# Altium PCB Copy of main - shifted.PcbDoc (part 6 of 15)
Units mil, origin at the board's own origin, x right, y up, seen from the top; angles counter-clockwise.
Board outline 8394.55 x 5164.44 mil, 7 copper layers (Top Layer 1, Layer 2, Layer 3, Unused, Layer 4_pow, Layer 5_gnd, Bottom 6+gnd), stack 46.112 mil thick; 363 components, 409 nets, 1750 pads, 991 vias.
Unrouted connection lines stored in the file: 111.
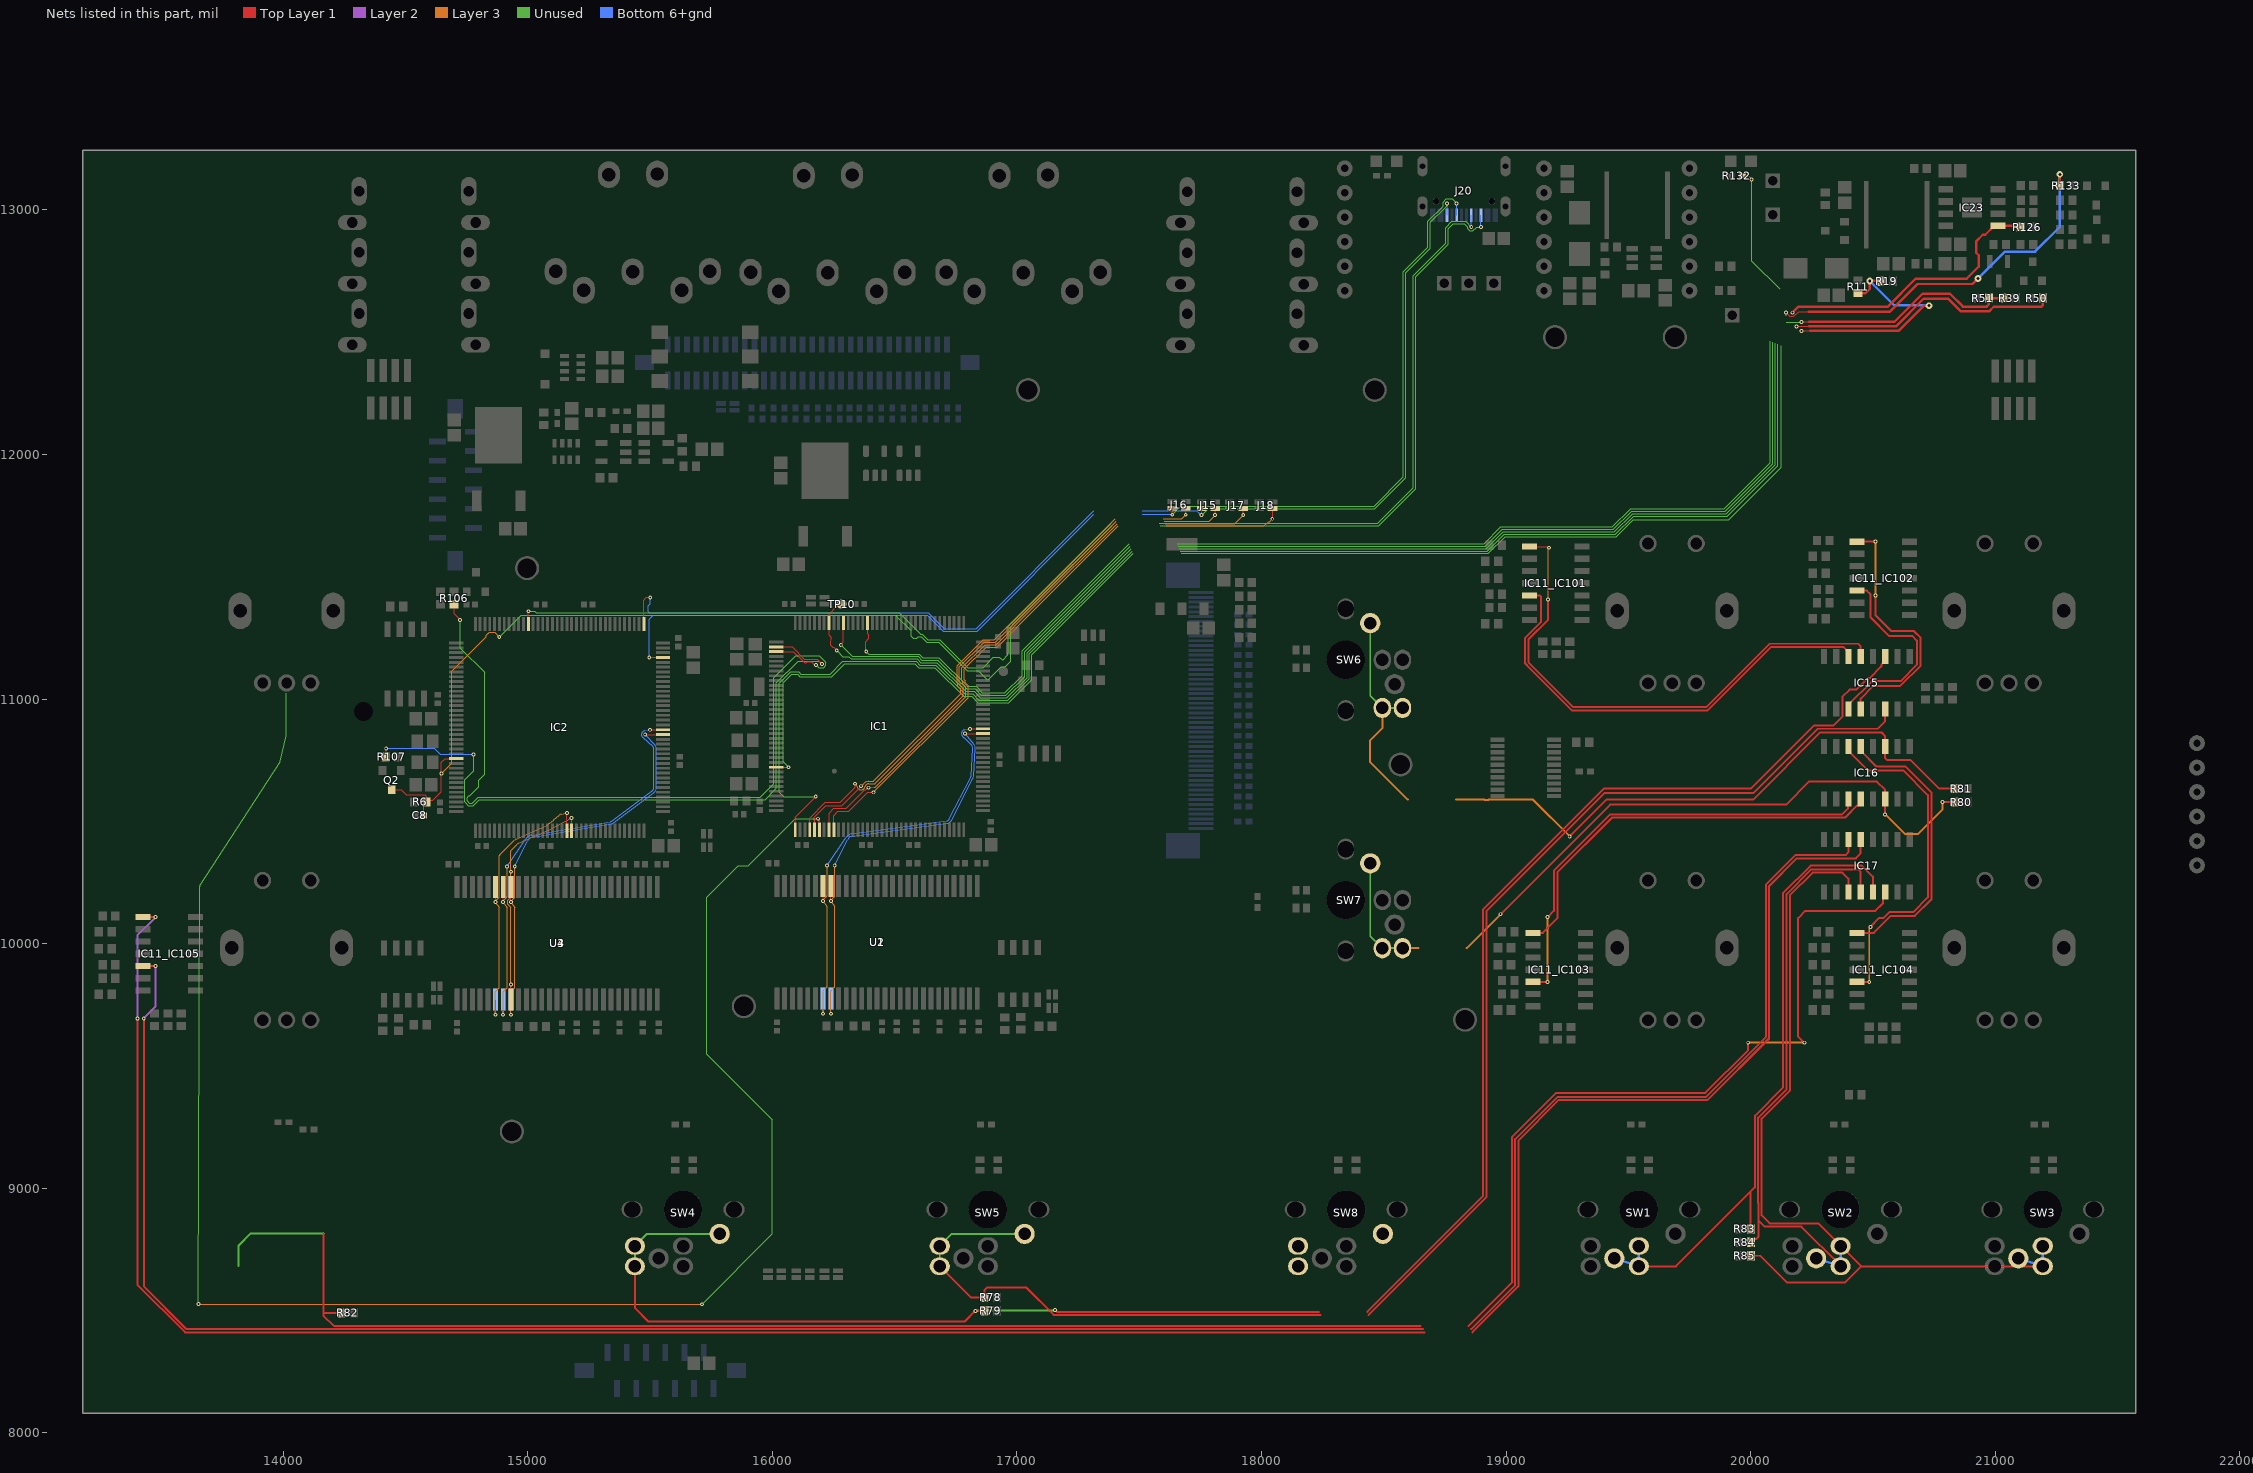
[diagram p9: the nets of this part, all layers, seen from the top]

## Via types
v1: diameter 15.75, hole 7.87, Top Layer 1 to Bottom 6+gnd, tented both sides, 923 vias
v2: diameter 27.56, hole 11.81, Top Layer 1 to Bottom 6+gnd, 45 vias
v3: diameter 23.62/23.62/23.62/23.62/23.62/23.62/23.62 (per signal layer), hole 12, Top Layer 1 to Bottom 6+gnd, tented top, 10 vias
v4: diameter 15.75, hole 7.87, Top Layer 1 to Bottom 6+gnd, 10 vias
v5: diameter 23.62/23.62/23.62/23.62/23.62/23.62/23.62 (per signal layer), hole 12, Top Layer 1 to Bottom 6+gnd, tented bottom, 3 vias

## Nets (pads, with @x,y where several pads share a name; then routed paths per layer and width w, separated by ;. In a path a pad name is that pad's centre, name@x,y a point inside that pad or via, vN(x,y) a via of type N, cw(c..) or ccw(c..) an arc to the next point about the centre after c; other vN are vias at no path point) (continued)
AA10: IC2.56 U3.22 U4.22 | length 1723.1
  Top Layer 1 w5: v1@14867.88,10170.19 U3.22@14867.88,10232.03 ; IC2.56@15159.54,10461.71 v1@15159.54,10534.31
  Layer 3 w5: v1(14867.64,9709.31) 14867.64,9803 14883.76,9819.12 14883.76,10145.78 ; v1(14867.64,10169.94) ccw(c14871.79,10172.73) 14867.72,10169.82 14882.83,10148.64 ; v1@14867.64,10175.64 14867.64,10175.51 cw(c14871.79,10172.73) 14868.22,10176.22 14882.3,10190.35 ; 14883.76,10193.83 14883.76,10360.07 ; v1(15159.46,10534.39) 15136.24,10529.43 ccw(c15139.46,10514.39) 15129.19,10525.84 15106.8,10505.74 ; 14882.3,10190.35 ccw(c14878.76,10193.88) 14883.76,10193.79 ; 14882.3,10190.35 ccw(c14878.76,10193.88) 14883.76,10193.79 ; 14882.3,10190.35 ccw(c14878.76,10193.88) 14883.76,10193.79 ; 14882.3,10190.35 ccw(c14878.76,10193.88) 14883.76,10193.79 ; 14882.3,10190.35 ccw(c14878.76,10193.88) 14883.76,10193.79 ; 14882.3,10190.35 ccw(c14878.76,10193.88) 14883.76,10193.79 ; 14882.3,10190.35 ccw(c14878.76,10193.88) 14883.76,10193.79 ; 14882.3,10190.35 ccw(c14878.76,10193.88) 14883.76,10193.79 ; 14882.3,10190.35 ccw(c14878.76,10193.88) 14883.76,10193.79 ; 14882.3,10190.35 ccw(c14878.76,10193.88) 14883.76,10193.79 ; 14882.3,10190.35 ccw(c14878.76,10193.88) 14883.76,10193.79 ; 14882.3,10190.35 ccw(c14878.76,10193.88) 14883.76,10193.79 ; 14882.3,10190.35 ccw(c14878.76,10193.88) 14883.76,10193.79 ; 14882.3,10190.35 ccw(c14878.76,10193.88) 14883.76,10193.79 ; 14882.3,10190.35 ccw(c14878.76,10193.88) 14883.76,10193.79 ; 14882.3,10190.35 ccw(c14878.76,10193.88) 14883.76,10193.79 ; 14882.83,10148.64 cw(c14878.76,10145.74) 14883.76,10145.83 ; 14882.83,10148.64 cw(c14878.76,10145.74) 14883.76,10145.83 ; 14882.83,10148.64 cw(c14878.76,10145.74) 14883.76,10145.83 ; 14882.83,10148.64 cw(c14878.76,10145.74) 14883.76,10145.83 ; 14882.83,10148.64 cw(c14878.76,10145.74) 14883.76,10145.83 ; 14882.83,10148.64 cw(c14878.76,10145.74) 14883.76,10145.83 ; 14882.83,10148.64 cw(c14878.76,10145.74) 14883.76,10145.83 ; 14882.83,10148.64 cw(c14878.76,10145.74) 14883.76,10145.83 ; 14882.83,10148.64 cw(c14878.76,10145.74) 14883.76,10145.83 ; 14882.83,10148.64 cw(c14878.76,10145.74) 14883.76,10145.83 ; 14882.83,10148.64 cw(c14878.76,10145.74) 14883.76,10145.83 ; 14882.83,10148.64 cw(c14878.76,10145.74) 14883.76,10145.83 ; 14882.83,10148.64 cw(c14878.76,10145.74) 14883.76,10145.83 ; 14882.83,10148.64 cw(c14878.76,10145.74) 14883.76,10145.83 ; 14882.83,10148.64 cw(c14878.76,10145.74) 14883.76,10145.83 ; 14882.83,10148.64 cw(c14878.76,10145.74) 14883.76,10145.83 ; 14883.76,10360.07 cw(c14888.76,10360.07) 14885.2,10363.58 ; 14883.76,10360.07 cw(c14888.76,10360.07) 14885.2,10363.58 ; 14883.76,10360.07 cw(c14888.76,10360.07) 14885.2,10363.58 ; 14883.76,10360.07 cw(c14888.76,10360.07) 14885.2,10363.58 ; 14883.76,10360.07 cw(c14888.76,10360.07) 14885.2,10363.58 ; 14883.76,10360.07 cw(c14888.76,10360.07) 14885.2,10363.58 ; 14883.76,10360.07 cw(c14888.76,10360.07) 14885.2,10363.58 ; 14883.76,10360.07 cw(c14888.76,10360.07) 14885.2,10363.58 ; 14883.76,10360.07 cw(c14888.76,10360.07) 14885.2,10363.58 ; 14883.76,10360.07 cw(c14888.76,10360.07) 14885.2,10363.58 ; 14883.76,10360.07 cw(c14888.76,10360.07) 14885.2,10363.58 ; 14883.76,10360.07 cw(c14888.76,10360.07) 14885.2,10363.58 ; 14883.76,10360.07 cw(c14888.76,10360.07) 14885.2,10363.58 ; 14883.76,10360.07 cw(c14888.76,10360.07) 14885.2,10363.58 ; 14883.76,10360.07 cw(c14888.76,10360.07) 14885.2,10363.58 ; 14883.76,10360.07 cw(c14888.76,10360.07) 14885.2,10363.58 ; 14885.2,10363.58 14942.45,10420.83 ; 14942.45,10420.83 cw(c14967.12,10396.01) 14952.68,10427.89 ; 14942.45,10420.83 cw(c14967.12,10396.01) 14952.68,10427.89 ; 14942.45,10420.83 cw(c14967.12,10396.01) 14952.68,10427.89 ; 14942.45,10420.83 cw(c14967.12,10396.01) 14952.68,10427.89 ; 14942.45,10420.83 cw(c14967.12,10396.01) 14952.68,10427.89 ; 14942.45,10420.83 cw(c14967.12,10396.01) 14952.68,10427.89 ; 14942.45,10420.83 cw(c14967.12,10396.01) 14952.68,10427.89 ; 14942.45,10420.83 cw(c14967.12,10396.01) 14952.68,10427.89 ; 14942.45,10420.83 cw(c14967.12,10396.01) 14952.68,10427.89 ; 14942.45,10420.83 cw(c14967.12,10396.01) 14952.68,10427.89 ; 14942.45,10420.83 cw(c14967.12,10396.01) 14952.68,10427.89 ; 14942.45,10420.83 cw(c14967.12,10396.01) 14952.68,10427.89 ; 14942.45,10420.83 cw(c14967.12,10396.01) 14952.68,10427.89 ; 14942.45,10420.83 cw(c14967.12,10396.01) 14952.68,10427.89 ; 14942.45,10420.83 cw(c14967.12,10396.01) 14952.68,10427.89 ; 14942.45,10420.83 cw(c14967.12,10396.01) 14952.68,10427.89 ; 14952.68,10427.89 15002.85,10450.71 ; 15002.85,10450.71 cw(c15021.64,10409.41) 15003.8,10451.13 ; 15002.85,10450.71 cw(c15021.64,10409.41) 15003.8,10451.13 ; 15002.85,10450.71 cw(c15021.64,10409.41) 15003.79,10451.13 ; 15002.85,10450.71 cw(c15021.64,10409.41) 15003.79,10451.13 ; 15002.85,10450.71 cw(c15021.64,10409.41) 15003.79,10451.13 ; 15002.85,10450.71 cw(c15021.64,10409.41) 15003.79,10451.13 ; 15002.85,10450.71 cw(c15021.64,10409.41) 15003.79,10451.13 ; 15002.85,10450.71 cw(c15021.64,10409.41) 15003.79,10451.13 ; 15002.85,10450.71 cw(c15021.64,10409.41) 15003.79,10451.13 ; 15002.85,10450.71 cw(c15021.64,10409.41) 15003.79,10451.13 ; 15002.85,10450.71 cw(c15021.64,10409.41) 15003.79,10451.13 ; 15002.85,10450.71 cw(c15021.64,10409.41) 15003.79,10451.13 ; 15002.85,10450.71 cw(c15021.64,10409.41) 15003.79,10451.13 ; 15002.85,10450.71 cw(c15021.64,10409.41) 15003.79,10451.13 ; 15002.85,10450.71 cw(c15021.64,10409.41) 15003.79,10451.13 ; 15002.85,10450.71 cw(c15021.64,10409.41) 15003.79,10451.13 ; 15003.8,10451.13 15075.96,10482.13 ; 15075.96,10482.13 ccw(c15062,10514.63) 15084.49,10487.33 ; 15075.96,10482.13 ccw(c15062,10514.63) 15084.49,10487.33 ; 15075.96,10482.13 ccw(c15062,10514.63) 15084.49,10487.33 ; 15075.96,10482.13 ccw(c15062,10514.63) 15084.49,10487.33 ; 15075.96,10482.13 ccw(c15062,10514.63) 15084.49,10487.33 ; 15075.96,10482.13 ccw(c15062,10514.63) 15084.49,10487.33 ; 15075.96,10482.13 ccw(c15062,10514.63) 15084.49,10487.33 ; 15075.96,10482.13 ccw(c15062,10514.63) 15084.49,10487.33 ; 15075.96,10482.13 ccw(c15062,10514.63) 15084.49,10487.33 ; 15075.96,10482.13 ccw(c15062,10514.63) 15084.49,10487.33 ; 15075.96,10482.13 ccw(c15062,10514.63) 15084.49,10487.33 ; 15075.96,10482.13 ccw(c15062,10514.63) 15084.49,10487.33 ; 15075.96,10482.13 ccw(c15062,10514.63) 15084.49,10487.33 ; 15075.96,10482.13 ccw(c15062,10514.63) 15084.49,10487.33 ; 15075.96,10482.13 ccw(c15062,10514.63) 15084.49,10487.33 ; 15075.96,10482.13 ccw(c15062,10514.63) 15084.49,10487.33 ; 15084.49,10487.33 15105.99,10505.05 ; 15105.99,10505.05 ccw(c15089.85,10524.63) 15106.8,10505.74 ; 15105.99,10505.05 ccw(c15089.85,10524.63) 15106.8,10505.74 ; 15105.99,10505.05 ccw(c15089.85,10524.63) 15106.8,10505.74 ; 15105.99,10505.05 ccw(c15089.85,10524.63) 15106.8,10505.74 ; 15105.99,10505.05 ccw(c15089.85,10524.63) 15106.8,10505.74 ; 15105.99,10505.05 ccw(c15089.85,10524.63) 15106.8,10505.74 ; 15105.99,10505.05 ccw(c15089.85,10524.63) 15106.8,10505.74 ; 15105.99,10505.05 ccw(c15089.85,10524.63) 15106.8,10505.74 ; 15105.99,10505.05 ccw(c15089.85,10524.63) 15106.8,10505.74 ; 15105.99,10505.05 ccw(c15089.85,10524.63) 15106.8,10505.74 ; 15105.99,10505.05 ccw(c15089.85,10524.63) 15106.8,10505.74 ; 15105.99,10505.05 ccw(c15089.85,10524.63) 15106.8,10505.74 ; 15105.99,10505.05 ccw(c15089.85,10524.63) 15106.8,10505.74 ; 15105.99,10505.05 ccw(c15089.85,10524.63) 15106.8,10505.74 ; 15105.99,10505.05 ccw(c15089.85,10524.63) 15106.8,10505.74 ; 15105.99,10505.05 ccw(c15089.85,10524.63) 15106.8,10505.74
  Bottom 6+gnd w5: v1@14867.88,9709.56 U4.22@14867.88,9771.4
AA11: IC2.57 U3.35 U4.35 | length 1197.8
  Top Layer 1 w5: U3.35@14930.87,9771.4 v1@14930.87,9833.49 ; IC2.57@15179.12,10461.87 v1@15179.06,10514.16
  Layer 3 w5: v1(14931.12,9833.49) 14931.12,10145.64 ; 14931.12,10195.56 14931.12,10293.63 v1(14930.63,10294.12) 14930.63,10378.65 ; v1(15178.83,10514.39) 15088.14,10465.82 cw(c15062,10514.63) 15083.87,10463.76 15011.72,10432.77 ; 14929.66,10149.12 cw(c14926.12,10145.59) 14931.12,10145.68 ; 14929.66,10149.12 cw(c14926.12,10145.59) 14931.12,10145.68 ; 14929.66,10149.12 cw(c14926.12,10145.59) 14931.12,10145.68 ; 14929.66,10149.12 cw(c14926.12,10145.59) 14931.12,10145.68 ; 14929.66,10149.12 cw(c14926.12,10145.59) 14931.12,10145.68 ; 14929.66,10149.12 cw(c14926.12,10145.59) 14931.12,10145.68 ; 14929.66,10149.12 cw(c14926.12,10145.59) 14931.12,10145.68 ; 14929.66,10149.12 cw(c14926.12,10145.59) 14931.12,10145.68 ; 14929.66,10149.12 cw(c14926.12,10145.59) 14931.12,10145.68 ; 14929.66,10149.12 cw(c14926.12,10145.59) 14931.12,10145.68 ; 14929.66,10149.12 cw(c14926.12,10145.59) 14931.12,10145.68 ; 14929.66,10149.12 cw(c14926.12,10145.59) 14931.12,10145.68 ; 14929.66,10149.12 cw(c14926.12,10145.59) 14931.12,10145.68 ; 14929.66,10149.12 cw(c14926.12,10145.59) 14931.12,10145.68 ; 14929.66,10149.12 cw(c14926.12,10145.59) 14931.12,10145.68 ; 14929.66,10149.12 cw(c14926.12,10145.59) 14931.12,10145.68 ; 14929.66,10149.12 14919.73,10159.1 cw(c14930.63,10169.94) 14919.1,10180.12 14929.86,10192.29 ; 14929.86,10192.29 ccw(c14926.12,10195.6) 14931.12,10195.51 ; 14929.86,10192.29 ccw(c14926.12,10195.6) 14931.12,10195.51 ; 14929.86,10192.29 ccw(c14926.12,10195.6) 14931.12,10195.51 ; 14929.86,10192.29 ccw(c14926.12,10195.6) 14931.12,10195.51 ; 14929.86,10192.29 ccw(c14926.12,10195.6) 14931.12,10195.51 ; 14929.86,10192.29 ccw(c14926.12,10195.6) 14931.12,10195.51 ; 14929.86,10192.29 ccw(c14926.12,10195.6) 14931.12,10195.51 ; 14929.86,10192.29 ccw(c14926.12,10195.6) 14931.12,10195.51 ; 14929.86,10192.29 ccw(c14926.12,10195.6) 14931.12,10195.51 ; 14929.86,10192.29 ccw(c14926.12,10195.6) 14931.12,10195.51 ; 14929.86,10192.29 ccw(c14926.12,10195.6) 14931.12,10195.51 ; 14929.86,10192.29 ccw(c14926.12,10195.6) 14931.12,10195.51 ; 14929.86,10192.29 ccw(c14926.12,10195.6) 14931.12,10195.51 ; 14929.86,10192.29 ccw(c14926.12,10195.6) 14931.12,10195.51 ; 14929.86,10192.29 ccw(c14926.12,10195.6) 14931.12,10195.51 ; 14929.86,10192.29 ccw(c14926.12,10195.6) 14931.12,10195.51 ; 14930.63,10378.65 cw(c14935.63,10378.65) 14932.07,10382.17 ; 14930.63,10378.65 cw(c14935.63,10378.65) 14932.07,10382.17 ; 14930.63,10378.65 cw(c14935.63,10378.65) 14932.07,10382.17 ; 14930.63,10378.65 cw(c14935.63,10378.65) 14932.07,10382.17 ; 14930.63,10378.65 cw(c14935.63,10378.65) 14932.07,10382.17 ; 14930.63,10378.65 cw(c14935.63,10378.65) 14932.07,10382.17 ; 14930.63,10378.65 cw(c14935.63,10378.65) 14932.07,10382.17 ; 14930.63,10378.65 cw(c14935.63,10378.65) 14932.07,10382.17 ; 14930.63,10378.65 cw(c14935.63,10378.65) 14932.07,10382.17 ; 14930.63,10378.65 cw(c14935.63,10378.65) 14932.07,10382.17 ; 14930.63,10378.65 cw(c14935.63,10378.65) 14932.07,10382.17 ; 14930.63,10378.65 cw(c14935.63,10378.65) 14932.07,10382.17 ; 14930.63,10378.65 cw(c14935.63,10378.65) 14932.07,10382.17 ; 14930.63,10378.65 cw(c14935.63,10378.65) 14932.07,10382.17 ; 14930.63,10378.65 cw(c14935.63,10378.65) 14932.07,10382.17 ; 14930.63,10378.65 cw(c14935.63,10378.65) 14932.07,10382.17 ; 14932.07,10382.17 14956.56,10406.65 cw(c14967.12,10396.01) 14960.91,10409.66 15011.08,10432.48 ; 15011.08,10432.48 cw(c15021.64,10409.41) 15011.72,10432.77 ; 15011.08,10432.48 cw(c15021.64,10409.41) 15011.72,10432.77 ; 15011.08,10432.48 cw(c15021.64,10409.41) 15011.72,10432.77 ; 15011.08,10432.48 cw(c15021.64,10409.41) 15011.72,10432.77 ; 15011.08,10432.48 cw(c15021.64,10409.41) 15011.72,10432.77 ; 15011.08,10432.48 cw(c15021.64,10409.41) 15011.72,10432.77 ; 15011.08,10432.48 cw(c15021.64,10409.41) 15011.72,10432.77 ; 15011.08,10432.48 cw(c15021.64,10409.41) 15011.72,10432.77 ; 15011.08,10432.48 cw(c15021.64,10409.41) 15011.72,10432.77 ; 15011.08,10432.48 cw(c15021.64,10409.41) 15011.72,10432.77 ; 15011.08,10432.48 cw(c15021.64,10409.41) 15011.72,10432.77 ; 15011.08,10432.48 cw(c15021.64,10409.41) 15011.72,10432.77 ; 15011.08,10432.48 cw(c15021.64,10409.41) 15011.72,10432.77 ; 15011.08,10432.48 cw(c15021.64,10409.41) 15011.72,10432.77 ; 15011.08,10432.48 cw(c15021.64,10409.41) 15011.72,10432.77 ; 15011.08,10432.48 cw(c15021.64,10409.41) 15011.72,10432.77
  Bottom 6+gnd w5: U4.35@14930.87,10232.03 v1@14930.87,10293.87
ADC3: IC1.40 J15.3 | length 2171.1
  Top Layer 1 w5: IC1.40@16152.72,10466.06 16152.72,10513.38 16216.73,10577.4 16276.73,10577.4 16338.15,10638.82 v1(16338.15,10653.82) ; v1@17810.12,11752.72 J15.3@17810.12,11778.82
  Layer 3 w5: v1(16338.15,10653.82) 16349.97,10635.49 ccw(c16362.89,10643.82) 16377.12,10637.99 16379.41,10643.59 cw(c16393.64,10637.76) 16393.2,10653.13 16417.96,10653.84 ccw(c16417.81,10658.84) 16421.33,10655.28 16780.39,11014.34 16780.39,11045.72 16768.49,11057.62 16768.49,11066.26 16764.86,11069.89 16764.86,11131.86 16865.84,11232.83 16911.08,11232.83 17054.97,11376.72 17054.97,11377.1 17405.74,11727.87 ; 17602.59,11727.87 17785.51,11727.87 v1(17810.24,11752.6)
ADC4: IC1.41 J16.3 | length 2000.2
  Top Layer 1 w5: IC1.41@16172.4,10466.06 16172.42,10503.18 16170.82,10504.78 16170.82,10517.35 16217.71,10564.23 16283.31,10564.23 v1(16362.89,10643.82) ; v1@17690,11753.94 J16.3@17690,11780.04
  Layer 3 w5: v1(16362.89,10643.82) 16376.36,10656.34 cw(c16393.64,10637.76) 16392.19,10663.1 16411.76,10664.22 ccw(c16411.47,10669.21) 16414.99,10665.66 16770.39,11021.06 16770.39,11041.58 16758.49,11053.48 16758.49,11062.12 16754.86,11065.75 16754.86,11136 16861.69,11242.83 16906.93,11242.83 17043.15,11379.05 17043.15,11379.43 17401.6,11737.87 ; 17598.45,11737.87 17674.17,11737.87 v1(17690.12,11753.82)
ADC5: IC1.44 J17.3 | length 2185.5
  Top Layer 1 w5: IC1.44@16231.57,10466.17 16231.57,10533.33 16250.93,10552.7 16302.03,10552.7 16377.73,10628.4 16381.36,10628.4 16390.73,10637.76 v1(16393.64,10637.76) ; v1@17925.12,11752.72 J17.3@17925.12,11778.82
  Layer 3 w5: v1(16393.64,10637.76) 16417.16,10638.82 ccw(c16416.94,10643.82) 16420.47,10640.28 16790.39,11010.2 16790.39,11049.86 16778.49,11061.76 16778.49,11070.4 16774.86,11074.03 16774.86,11127.72 16869.98,11222.83 16915.22,11222.83 17064.97,11372.58 17064.97,11372.96 17409.88,11717.87 ; 17606.73,11717.87 17890.51,11717.87 v1(17925.24,11752.6)
ADC6: IC1.45 J18.3 | length 2289.6
  Top Layer 1 w5: IC1.45@16251.14,10466.06 16251.14,10523.99 16267.98,10540.83 16312.44,10540.83 16390.43,10618.82 v1(16413.15,10618.82) ; v1(18044.13,11737.22) 18045.12,11738.21 J18.3@18045.12,11778.82
  Layer 3 w5: v1(16413.15,10618.82) 16800.39,11006.06 16800.39,11054 16788.49,11065.9 16788.49,11074.55 16784.86,11078.18 16784.86,11123.57 16874.12,11212.83 16919.36,11212.83 17074.97,11368.44 17074.97,11368.82 17414.02,11707.87 ; 17610.87,11707.87 18011.84,11707.87 18030.02,11726.06 18032.96,11726.06 v1(18044.13,11737.22)
ADC_ON: IC1.137 R39.1 R51.2 TP10.1 | length 5894.1
  Top Layer 1 w5: v1(16263.15,11198.82) 16250.11,11211.86 16246.65,11211.86 16237.64,11220.87 16237.64,11237.47 16240.38,11240.21 16240.38,11252.94 16231.46,11261.87 IC1.137@16231.46,11311.57 16231.46,11347.13 16263.93,11379.6 16264.63,11379.6 16273.85,11388.82 TP10.1@16283.15,11388.82 ; v1(20207.88,12542.24) 20240.01,12542.24 20240.47,12542.7
  Top Layer 1 w10: 20240.47,12542.7 20587.73,12542.7 20702.6,12657.57 20815.11,12657.57 20867.69,12605 20964.65,12605 20974.02,12614.37 R51.2@20974.02,12639.37 R39.1@21032.83,12639.37
  Unused w5: v1(16263.15,11198.82) 16288.22,11173.74 16313.21,11173.74 16322.68,11164.27 16591.55,11164.27 16607,11148.82 16672.9,11148.82 16789.98,11031.74 16824.37,11031.74 16850.28,11005.83 16959.15,11005.83 17041.15,11087.82 17041.15,11189.4 17467.14,11615.39 ; 17663.99,11615.39 18919,11615.39 18987.43,11683.82 19442.43,11683.82 19517.05,11758.44 19900.87,11758.44 20100,11957.57 20100,12455.88 ; 20144.75,12540 20199.57,12540 20199.75,12540.18 20205.82,12540.18 v1(20207.88,12542.24)
ADC_VBAT: IC1.37 R50.2 | length 6830.8
  Top Layer 1 w5: IC1.37@16093.66,10472.3 16093.66,10517.58 v1(16177.28,10601.21) ; v1(20187.63,12523.86) 20239.74,12523.86 20239.89,12524.01
  Top Layer 1 w10: 20239.89,12524.01 20594.3,12524.01 20707.87,12637.57 20806.83,12637.57 20859.4,12585 20974.65,12585 20993.98,12604.34 21189.34,12604.34 21195.2,12610.19 R50.2@21195.2,12639.37
  Unused w5: v1(16177.28,10601.21) 16046.63,10601.21 16044.47,10603.37 16028.15,10619.68 16028.15,11063.82 16075.44,11111.1 16107.17,11111.1 16116.44,11101.83 16236.16,11101.83 16288.61,11154.27 16587.41,11154.27 16602.86,11138.82 16668.75,11138.82 16785.83,11021.74 16818.38,11021.74 16844.29,10995.83 16963.29,10995.83 17051.15,11083.68 17051.15,11185.26 17471.28,11605.39 ; 17668.13,11605.39 18923.14,11605.39 18991.57,11673.82 19446.57,11673.82 19521.19,11748.44 19905.01,11748.44 20110,11953.43 20110,12451.74
ADC_VOL: IC1.42 | length 7186.8
  Top Layer 1 w5: v1(16186.2,10510.94) 16186.2,10508.6 16192.2,10502.6 16192.2,10466.17 IC1.42@16192.09,10466.06
  Unused w5: v1(13653.15,8526) 13658.15,10233.53 cw(c13663.15,10233.52) 13658.94,10236.22 13987.68,10744.28 ccw(c13983.48,10746.99) 13988.35,10745.84 14013.15,10850 14013.15,11024.25 ; v1(15712.58,8525.57) 16000.15,8813.15 16000.15,9279 15732.15,9547 15732.15,10189.82 15861.33,10319 15901.17,10319 16093.11,10510.94 v1(16186.2,10510.94)
  Layer 3 w5: v1(13653.15,8526) v1@15712.58,8526
ADC_VUSB: IC1.27 R11.1 R19.2 | length 6337.8
  Top Layer 1 w5: IC1.27@16015.47,10721.42 16015.5,10721.46 16066.16,10721.46 v1(16066.2,10721.42) ; v1(20208.62,12505.76) 20209.06,12505.32 20243.39,12505.32
  Top Layer 1 w10: 20243.39,12505.32 20605.16,12505.32 20708.63,12608.79 v2(20729.65,12608.79) ; R11.1@20439.65,12660 20469.65,12660 20487.15,12677.5 v2(20487.15,12710) R19.2@20529.65,12710
  Unused w5: v1(16066.2,10721.42) 16044.45,10743.17 16044.45,11065.98 16079.58,11101.1 16103.02,11101.1 16112.3,11091.83 16243.07,11091.83 16295.51,11144.27 16582.69,11144.27 16598.15,11128.82 16664.61,11128.82 16781.69,11011.74 16814.24,11011.74 16840.15,10985.83 16967.44,10985.83 17061.15,11079.54 17061.15,11181.12 17475.42,11595.39 ; 17672.27,11595.39 18927.28,11595.39 18995.71,11663.82 19450.71,11663.82 19519.96,11733.07 19911.38,11733.07 20125.37,11947.06 20125.37,12445.37 ; 20200.31,12508.49 20200.98,12507.82 20206.56,12507.82 v1(20208.62,12505.76)
  Bottom 6+gnd w10: v2(20487.15,12710) 20587.15,12610 20728.44,12610 v2(20729.65,12608.79)
AUDIO_BOOT: IC1.3 R106.1 | length 3126.4
  Top Layer 1 w5: R106.1@14698.15,11393.54 14698.15,11348.82 v1(14723.15,11323.82) ; IC1.3@16015.39,11193.94 16085.85,11193.94 16125.97,11153.82 16126.41,11153.82 16131.84,11148.39 16137.7,11148.39 16142.18,11152.87 16159.1,11152.87 16173.15,11138.82 v1(16177.59,11138.82)
  Unused w5: v1(14723.15,11323.82) 14723.15,11208.82 14823.17,11108.8 14823.17,10692.81 14798.34,10667.99 14798.34,10641.31 14762.5,10605.47 14760.48,10605.47 14758.83,10603.82 14758.15,10603.82 14751.48,10597.15 14751.48,10583.73 14760.48,10574.73 14773.22,10574.73 14797.31,10598.82 15950.21,10598.82 16006.26,10654.87 16006.26,11086.93 16096.02,11176.69 16138.63,11176.69 16138.87,11176.46 16192.25,11176.46 16218.15,11150.56 16218.15,11137.82 16209.14,11128.82 16190.5,11128.82 16180.5,11138.82 v1(16177.59,11138.82)
AUDIO_NRST: C8.2 IC2.25 J20.B5 Q2.3 R6.2 | length 6660.8
  Top Layer 1 w5: Q2.3@14443.15,10629.45 14482.52,10629.45 14502.81,10609.16 14578.15,10609.16 14584.41,10602.9 14584.41,10580.72 R6.2@14585.5,10579.63 ; C8.2@14574.91,10524.63 14574.91,10569.04 R6.2@14585.5,10579.63 ; IC2.25@14707.15,10756.68 14661.96,10756.68 14646.54,10741.26 v1(14646.54,10695.26) 14646.54,10620.54 14611.96,10585.96 14591.83,10585.96 R6.2@14585.5,10579.63
  Unused w5: v1(14883.15,11253.82) 14973.15,11343.82 16503.32,11343.82 16567.53,11279.61 16567.53,11257.87 16576.53,11248.86 16589.27,11248.86 16596.32,11255.91 16608.38,11255.91 16631.71,11232.58 16679.74,11232.58 16796.12,11116.2 16841.12,11116.2 16878.33,11079 16882.64,11079 16936.61,11132.97 16952.3,11132.97 16974.84,11155.51 16974.84,11294.12 17389.71,11708.99 ; 17586.56,11708.99 18478.99,11708.99 18630.37,11860.37 18630.37,12727.65 18763.32,12860.6 18763.32,12923.82 18782.93,12943.43 18829.22,12943.43 18842.4,12930.25 18842.4,12923.69 18851.4,12914.68 18864.14,12914.68 18879.51,12930.05 v1(18897.14,12930.05)
  Layer 3 w5: v1(14646.54,10695.26) 14688.15,10736.86 14688.15,11113.82 14829.48,11255.14 14829.48,11261 14837.29,11268.81 14839.17,11268.81 14843.04,11272.68 14864.29,11272.68 v1(14883.15,11253.82)
  Bottom 6+gnd w5: J20.B5@18896.71,12978.4 18896.71,12930.49 v1(18897.14,12930.05)
AUDIO_RST: IC1.2 R107.1 | length 2792.5
  Top Layer 1 w5: R107.1@14420.51,10768.82 14420.51,10797.95 v1(14420.85,10798.29) ; IC1.2@16015.39,11213.62 16080.31,11213.62 16130.11,11163.82 16183.15,11163.82 v1(16202.78,11144.19)
  Unused w5: v1(14778.15,10773.82) 14778.15,10706.08 14741.48,10669.41 14741.48,10579.59 14756.34,10564.73 14777.36,10564.73 14801.45,10588.82 15970.21,10588.82 16016.26,10634.87 16016.26,11066.93 16104.81,11155.48 16188.58,11155.48 16199.87,11144.19 v1(16202.78,11144.19)
  Bottom 6+gnd w5: v1(14420.85,10798.29) 14617.43,10798.29 14641.9,10773.82 v1(14778.15,10773.82)
AUDIO_SWD.CLK_1: IC2.109 J15.1 J20.B8 | length 4655.8
  Top Layer 1 w5: IC2.109@15474.4,11307.38 15473.95,11307.83 15473.95,11405.04 15484.96,11416.05 v1(15500.64,11416.05) ; v1@17755,11752.72 J15.1@17755,11778.82
  Unused w5: v1(17755.12,11752.6) 17781.42,11778.9 18463.98,11778.9 18590.37,11905.29 18590.37,12744.22 18689.39,12843.24 18689.39,12948.89 18756.42,13015.92 18756.42,13024.41 v1@18758.62,13026.61
  Bottom 6+gnd w5: v1(15500.64,11416.05) 15500.64,11388.99 15492.8,11381.15 15492.8,11356.99 15495.97,11353.82 16636.91,11353.82 16702.84,11287.89 16832.64,11287.89 17314.55,11769.8 ; 17511.4,11769.8 17735.83,11769.8 17753.03,11752.6 v1(17755.12,11752.6) ; J20.B8@18758.91,12978.4 v1@18758.91,13026.32
  other v1: 18758.48,13026.75
AUDIO_SWD.IO_1: IC2.105 J16.1 J20.B7 | length 4729.9
  Top Layer 1 w5: v1(15496.48,11170.26) 15496.58,11170.16 15552.57,11170.16 IC2.105@15552.67,11170.06 ; J16.1@17634.88,11780.04 17634.88,11753.94 v1(17635,11753.82)
  Unused w5: v1(17635,11753.82) 17670.17,11788.98 18459.93,11788.98 18580.37,11909.43 18580.37,12748.36 18679.39,12847.38 18679.39,12953.03 18742.35,13015.99 18742.35,13032.37 18755.04,13045.05 18779.55,13045.05 v1(18797.85,13026.75)
  Bottom 6+gnd w5: v1(15496.48,11170.26) 15496.48,11327.15 15512.78,11343.44 16633.14,11343.44 16698.69,11277.89 16836.78,11277.89 17314.69,11755.81 ; 17511.54,11755.81 17633.01,11755.81 v1(17635,11753.82) ; J20.B7@18798.28,12978.4 v1@18798.28,13026.32
AUDIO_SWD.SWO_1: IC2.133 J20.B6 | length 5240.2
  Top Layer 1 w5: IC2.133@15001.96,11307.38 15001.96,11358 v1(15003.15,11359.19)
  Unused w5: v1(15003.15,11359.19) 15028.38,11359.19 15033.75,11353.82 16518.62,11353.82 16606.53,11265.91 16612.52,11265.91 16635.85,11242.58 16684.39,11242.58 16798.15,11128.82 16861.59,11128.82 16903.92,11171.15 16928.54,11171.15 16938.85,11160.83 16942.99,11160.83 16963.15,11180.99 16963.15,11188.82 16964.84,11190.51 16964.84,11298.26 17385.57,11718.99 ; 17582.42,11718.99 18474.84,11718.99 18620.37,11864.51 18620.37,12731.79 18753.32,12864.75 18753.32,12927.96 18778.78,12953.43 18834.4,12953.43 v1(18857.77,12930.05)
  Bottom 6+gnd w5: v1@18857.34,12930.49 J20.B6@18857.34,12978.4
B_ENC1: IC11_IC101.8 IC15.13 | length 2174.1
  Top Layer 1 w5: IC11_IC101.8@19095.43,11623.82 19167.09,11623.82 19172.09,11618.82 v1(19175,11618.82)
  Top Layer 1 w8: v1(19171.97,11407.3) 19171.97,11324.92 19090.7,11243.65 19090.7,11150.93 19109.3,11132.33 19274.7,10966.93 19300.34,10966.93 19818.64,10966.93 20078.04,11226.33 20440,11226.33 20450,11216.33 IC15.13@20450,11173.82
  Layer 3 w5: v1(19171.97,11407.3) 19171.97,11615.79 v1(19175,11618.82)
B_ENC2: IC11_IC102.8 IC15.4 | length 1056
  Top Layer 1 w8: IC11_IC102.8@20435,11643.82 v1(20510,11643.82) ; IC15.4@20450,10959.25 20450,11002.33 20501.49,11053.82 20611.55,11053.82 20695,11137.27 20695,11250.79 20667.9,11277.89 20575.93,11277.89 20510,11343.82 v1(20510,11423.82)
  Layer 3 w8: v1(20510,11423.82) v1(20510,11643.82)
B_ENC3: IC11_IC103.8 IC16.4 | length 1687.1
  Top Layer 1 w8: IC11_IC103.8@19110.43,10043.82 19150,10043.82 19210,10103.82 19210,10292.1 19433.77,10515.88 20386.65,10515.88 20435.8,10565.02 20441.2,10565.02 20450,10573.82 IC16.4@20450,10591.53
B_ENC4: IC11_IC104.8 IC16.13 | length 1175.7
  Top Layer 1 w8: IC11_IC104.8@20435,10043.82 20503.79,10043.82 20573.79,10113.82 20671.21,10113.82 20740,10182.61 20740,10617.14 20633.32,10723.82 20514.57,10723.82 20450,10788.39 IC16.13@20450,10806.1
B_ENC5: IC11_IC105.8 IC17.13 | length 10098.9
  Top Layer 1 w8: v1(13403.9,9693.82) 13403.9,8605.86 13598.93,8410.82 18665.53,8410.82 ; IC11_IC105.8@13425.86,10108.82 v1(13478.15,10108.82) ; 18862.38,8410.82 19050,8598.43 19050,9195.03 19215.79,9360.82 19823.62,9360.82 20075,9612.2 20075,10235.43 20188.38,10348.82 20430,10348.82 20450,10368.82 IC17.13@20450,10426.1
  Layer 2 w8: v1(13403.9,9693.82) 13403.9,10034.57 v1(13478.15,10108.82)
BA0_6: IC1.89 U1.20 U2.20 | length 2533.8
  Top Layer 1 w5: v1(16238.93,10174.13) U1.20@16238.93,10235.97 ; v1@16239.17,10174.38 U1.20@16239.17,10236.22 ; v1@16788.31,10859.29 IC1.89@16860.91,10859.29
  Layer 3 w5: v1(16238.93,9713.5) 16238.93,9805.11 cw(c16243.93,9805.12) 16240.37,9808.63 16253.59,9821.89 ; v1(16238.93,10174.13) ccw(c16243.89,10174.74) 16239.9,10171.73 16254.05,10152.93 ; v1@16238.93,10176.85 16238.93,10175.35 cw(c16243.89,10174.74) v1@16240.32,10178.25 ; v1@16240.33,10178.25 16253.59,10191.56 ccw(c16250.05,10195.09) 16255.05,10195 ; 16255.05,9825.38 16255.05,10150.02 ; 16255.05,10195.04 v1@16255.05,10316.84 ; 16253.59,9821.89 ccw(c16250.05,9825.42) 16255.05,9825.33 ; 16253.59,9821.89 ccw(c16250.05,9825.42) 16255.05,9825.33 ; 16253.59,9821.89 ccw(c16250.05,9825.42) 16255.05,9825.33 ; 16253.59,9821.89 ccw(c16250.05,9825.42) 16255.05,9825.33 ; 16253.59,9821.89 ccw(c16250.05,9825.42) 16255.05,9825.33 ; 16253.59,9821.89 ccw(c16250.05,9825.42) 16255.05,9825.33 ; 16253.59,9821.89 ccw(c16250.05,9825.42) 16255.05,9825.33 ; 16253.59,9821.89 ccw(c16250.05,9825.42) 16255.05,9825.33 ; 16253.59,9821.89 ccw(c16250.05,9825.42) 16255.05,9825.33 ; 16253.59,9821.89 ccw(c16250.05,9825.42) 16255.05,9825.33 ; 16253.59,9821.89 ccw(c16250.05,9825.42) 16255.05,9825.33 ; 16253.59,9821.89 ccw(c16250.05,9825.42) 16255.05,9825.33 ; 16253.59,9821.89 ccw(c16250.05,9825.42) 16255.05,9825.33 ; 16253.59,9821.89 ccw(c16250.05,9825.42) 16255.05,9825.33 ; 16253.59,9821.89 ccw(c16250.05,9825.42) 16255.05,9825.33 ; 16253.59,9821.89 ccw(c16250.05,9825.42) 16255.05,9825.33 ; 16254.05,10152.94 cw(c16250.05,10149.93) 16255.05,10150.02 ; 16254.05,10152.94 cw(c16250.05,10149.93) 16255.05,10150.02 ; 16254.05,10152.94 cw(c16250.05,10149.93) 16255.05,10150.02 ; 16254.05,10152.94 cw(c16250.05,10149.93) 16255.05,10150.02 ; 16254.05,10152.94 cw(c16250.05,10149.93) 16255.05,10150.02 ; 16254.05,10152.94 cw(c16250.05,10149.93) 16255.05,10150.02 ; 16254.05,10152.94 cw(c16250.05,10149.93) 16255.05,10150.02 ; 16254.05,10152.94 cw(c16250.05,10149.93) 16255.05,10150.02 ; 16254.05,10152.94 cw(c16250.05,10149.93) 16255.05,10150.02 ; 16254.05,10152.94 cw(c16250.05,10149.93) 16255.05,10150.02 ; 16254.05,10152.94 cw(c16250.05,10149.93) 16255.05,10150.02 ; 16254.05,10152.94 cw(c16250.05,10149.93) 16255.05,10150.02 ; 16254.05,10152.94 cw(c16250.05,10149.93) 16255.05,10150.02 ; 16254.05,10152.94 cw(c16250.05,10149.93) 16255.05,10150.02 ; 16254.05,10152.94 cw(c16250.05,10149.93) 16255.05,10150.02 ; 16254.05,10152.94 cw(c16250.05,10149.93) 16255.05,10150.02
  Bottom 6+gnd w5: v1@16239.17,9713.75 U2.20@16239.17,9775.59 ; v1(16254.76,10320.11) 16307.25,10424.96 ; v1(16788.23,10859.21) 16823.61,10815.7 ; 16307.25,10424.96 cw(c16329.94,10413.6) 16326.53,10438.74 ; 16307.25,10424.96 cw(c16329.94,10413.6) 16326.53,10438.74 ; 16307.25,10424.96 cw(c16329.94,10413.6) 16326.53,10438.74 ; 16307.25,10424.96 cw(c16329.94,10413.6) 16326.53,10438.74 ; 16307.25,10424.96 cw(c16329.94,10413.6) 16326.53,10438.74 ; 16307.25,10424.96 cw(c16329.94,10413.6) 16326.53,10438.74 ; 16307.25,10424.96 cw(c16329.94,10413.6) 16326.53,10438.74 ; 16307.25,10424.96 cw(c16329.94,10413.6) 16326.53,10438.74 ; 16307.25,10424.96 cw(c16329.94,10413.6) 16326.53,10438.74 ; 16307.25,10424.96 cw(c16329.94,10413.6) 16326.53,10438.74 ; 16307.25,10424.96 cw(c16329.94,10413.6) 16326.53,10438.74 ; 16307.25,10424.96 cw(c16329.94,10413.6) 16326.53,10438.74 ; 16307.25,10424.96 cw(c16329.94,10413.6) 16326.53,10438.74 ; 16307.25,10424.96 cw(c16329.94,10413.6) 16326.53,10438.74 ; 16307.25,10424.96 cw(c16329.94,10413.6) 16326.53,10438.74 ; 16307.25,10424.96 cw(c16329.94,10413.6) 16326.53,10438.74 ; 16326.53,10438.74 16713.7,10492.07 ccw(c16710.24,10517.2) 16732.79,10505.57 16819.54,10673.8 ; 16819.54,10673.8 ccw(c16796.99,10685.43) 16822.31,10683.89 ; 16819.54,10673.8 ccw(c16796.99,10685.43) 16822.31,10683.89 ; 16819.54,10673.8 ccw(c16796.99,10685.43) 16822.31,10683.89 ; 16819.54,10673.8 ccw(c16796.99,10685.43) 16822.31,10683.89 ; 16819.54,10673.8 ccw(c16796.99,10685.43) 16822.31,10683.89 ; 16819.54,10673.8 ccw(c16796.99,10685.43) 16822.31,10683.89 ; 16819.54,10673.8 ccw(c16796.99,10685.43) 16822.31,10683.89 ; 16819.54,10673.8 ccw(c16796.99,10685.43) 16822.31,10683.89 ; 16819.54,10673.8 ccw(c16796.99,10685.43) 16822.31,10683.89 ; 16819.54,10673.8 ccw(c16796.99,10685.43) 16822.31,10683.89 ; 16819.54,10673.8 ccw(c16796.99,10685.43) 16822.31,10683.89 ; 16819.54,10673.8 ccw(c16796.99,10685.43) 16822.31,10683.89 ; 16819.54,10673.8 ccw(c16796.99,10685.43) 16822.31,10683.89 ; 16819.54,10673.8 ccw(c16796.99,10685.43) 16822.31,10683.89 ; 16819.54,10673.8 ccw(c16796.99,10685.43) 16822.31,10683.89 ; 16819.54,10673.8 ccw(c16796.99,10685.43) 16822.31,10683.89 ; 16822.31,10683.89 16829.25,10798.15 ; 16823.61,10815.7 cw(c16803.93,10799.69) 16829.25,10798.16 ; 16823.61,10815.7 cw(c16803.93,10799.69) 16829.25,10798.16 ; 16823.61,10815.7 cw(c16803.93,10799.69) 16829.25,10798.16 ; 16823.61,10815.7 cw(c16803.93,10799.69) 16829.25,10798.16 ; 16823.61,10815.7 cw(c16803.93,10799.69) 16829.25,10798.15
BA1_6: IC1.90 U1.21 U2.21 | length 2022.6
  Top Layer 1 w5: v1(16207.43,10174.13) U1.21@16207.43,10235.97 ; v1@16207.68,10174.38 U1.21@16207.68,10236.22 ; v1(16808.23,10878.44) 16808.49,10878.71 16860.64,10878.71 IC1.90@16860.75,10878.82
  Layer 3 w5: v1(16207.43,9713.5) 16207.43,9805.11 cw(c16212.43,9805.12) 16208.88,9808.63 16222.1,9821.89 ; v1(16207.43,10174.13) ccw(c16211.59,10176.92) 16207.52,10174.01 16222.63,10152.83 ; v1@16207.43,10179.83 16207.43,10179.7 cw(c16211.59,10176.92) 16208.01,10180.41 16222.1,10194.54 ; 16223.55,9825.38 16223.55,10150.02 ; v1@16223.55,10319.82 16223.55,10198.02 ; 16222.1,9821.89 ccw(c16218.55,9825.42) 16223.55,9825.33 ; 16222.1,9821.89 ccw(c16218.55,9825.42) 16223.55,9825.33 ; 16222.1,9821.89 ccw(c16218.55,9825.42) 16223.55,9825.33 ; 16222.1,9821.89 ccw(c16218.55,9825.42) 16223.55,9825.33 ; 16222.1,9821.89 ccw(c16218.55,9825.42) 16223.55,9825.33 ; 16222.1,9821.89 ccw(c16218.55,9825.42) 16223.55,9825.33 ; 16222.1,9821.89 ccw(c16218.55,9825.42) 16223.55,9825.33 ; 16222.1,9821.89 ccw(c16218.55,9825.42) 16223.55,9825.33 ; 16222.1,9821.89 ccw(c16218.55,9825.42) 16223.55,9825.33 ; 16222.1,9821.89 ccw(c16218.55,9825.42) 16223.55,9825.33 ; 16222.1,9821.89 ccw(c16218.55,9825.42) 16223.55,9825.33 ; 16222.1,9821.89 ccw(c16218.55,9825.42) 16223.55,9825.33 ; 16222.1,9821.89 ccw(c16218.55,9825.42) 16223.55,9825.33 ; 16222.1,9821.89 ccw(c16218.55,9825.42) 16223.55,9825.33 ; 16222.1,9821.89 ccw(c16218.55,9825.42) 16223.55,9825.33 ; 16222.1,9821.89 ccw(c16218.55,9825.42) 16223.55,9825.33 ; 16222.1,10194.54 ccw(c16218.55,10198.07) 16223.55,10197.98 ; 16222.1,10194.54 ccw(c16218.55,10198.07) 16223.55,10197.98 ; 16222.1,10194.54 ccw(c16218.55,10198.07) 16223.55,10197.98 ; 16222.1,10194.54 ccw(c16218.55,10198.07) 16223.55,10197.98 ; 16222.1,10194.54 ccw(c16218.55,10198.07) 16223.55,10197.98 ; 16222.1,10194.54 ccw(c16218.55,10198.07) 16223.55,10197.98 ; 16222.1,10194.54 ccw(c16218.55,10198.07) 16223.55,10197.98 ; 16222.1,10194.54 ccw(c16218.55,10198.07) 16223.55,10197.98 ; 16222.1,10194.54 ccw(c16218.55,10198.07) 16223.55,10197.98 ; 16222.1,10194.54 ccw(c16218.55,10198.07) 16223.55,10197.98 ; 16222.1,10194.54 ccw(c16218.55,10198.07) 16223.55,10197.98 ; 16222.1,10194.54 ccw(c16218.55,10198.07) 16223.55,10197.98 ; 16222.1,10194.54 ccw(c16218.55,10198.07) 16223.55,10197.98 ; 16222.1,10194.54 ccw(c16218.55,10198.07) 16223.55,10197.98 ; 16222.1,10194.54 ccw(c16218.55,10198.07) 16223.55,10197.98 ; 16222.1,10194.54 ccw(c16218.55,10198.07) 16223.55,10197.98 ; 16222.62,10152.83 cw(c16218.55,10149.93) 16223.55,10150.02 ; 16222.62,10152.83 cw(c16218.55,10149.93) 16223.55,10150.02 ; 16222.62,10152.83 cw(c16218.55,10149.93) 16223.55,10150.02 ; 16222.62,10152.83 cw(c16218.55,10149.93) 16223.55,10150.02 ; 16222.62,10152.83 cw(c16218.55,10149.93) 16223.55,10150.02 ; 16222.62,10152.83 cw(c16218.55,10149.93) 16223.55,10150.02 ; 16222.62,10152.83 cw(c16218.55,10149.93) 16223.55,10150.02 ; 16222.62,10152.83 cw(c16218.55,10149.93) 16223.55,10150.02 ; 16222.62,10152.83 cw(c16218.55,10149.93) 16223.55,10150.02 ; 16222.62,10152.83 cw(c16218.55,10149.93) 16223.55,10150.02 ; 16222.62,10152.83 cw(c16218.55,10149.93) 16223.55,10150.02 ; 16222.62,10152.83 cw(c16218.55,10149.93) 16223.55,10150.02 ; 16222.62,10152.83 cw(c16218.55,10149.93) 16223.55,10150.02 ; 16222.62,10152.83 cw(c16218.55,10149.93) 16223.55,10150.02 ; 16222.62,10152.83 cw(c16218.55,10149.93) 16223.55,10150.02 ; 16222.62,10152.83 cw(c16218.55,10149.93) 16223.55,10150.02
  Bottom 6+gnd w5: v1@16207.68,9713.75 U2.21@16207.68,9775.59 ; v1(16223.27,10320.11) 16300.72,10433.55 cw(c16329.94,10413.6) 16325.11,10448.64 16712.33,10501.97 ccw(c16710.24,10517.2) 16723.9,10510.16 16810.65,10678.38 ccw(c16796.99,10685.43) 16812.33,10684.49 16819.27,10798.76 ccw(c16803.93,10799.69) 16814.85,10810.51 16792.52,10832.83 16792.52,10833.37 16783.46,10842.43 16783.27,10842.43 16777.31,10848.39 cw(c16788.23,10859.21) 16785.41,10874.33 ; 16785.41,10874.32 v1@16808.2,10878.58 ; v1(16808.23,10878.44) v1@16808.23,10878.55
BA01_7: IC2.89 U3.20 U4.20 | length 2319.1
  Top Layer 1 w5: v1@14930.87,10170.19 U3.20@14930.87,10232.03 ; v1@15480.01,10855.1 IC2.89@15552.61,10855.1
  Layer 3 w5: v1(14930.63,9709.47) 14930.63,9803 14946.75,9819.12 14946.75,10147.74 14945.53,10149.03 14931.6,10167.54 cw(c14935.59,10170.55) v1(14930.63,10169.94) ; v1@14930.63,10171.16 cw(c14935.59,10170.55) v1@14932.02,10174.06 ; v1@14932.03,10174.06 14945.29,10187.37 ccw(c14941.75,10190.9) 14946.75,10190.81 ; 14946.75,10190.85 v1@14946.75,10312.65
  Bottom 6+gnd w5: v1(14930.63,9709.47) 14930.63,9771.15 U4.20@14930.87,9771.4 ; v1@14946.22,10316.17 v1(14946.46,10315.92) 14998.95,10420.77 cw(c15021.64,10409.41) 15017.42,10434.43 15340.56,10489.38 ; v1@15479.68,10855.27 v1(15479.93,10855.02) 15518.63,10812.8 ; 15340.56,10489.38 ccw(c15336.31,10514.39) 15351.61,10494.16 ; 15340.56,10489.38 ccw(c15336.31,10514.39) 15351.61,10494.16 ; 15340.56,10489.38 ccw(c15336.31,10514.39) 15351.61,10494.16 ; 15340.56,10489.38 ccw(c15336.31,10514.39) 15351.61,10494.16 ; 15340.56,10489.38 ccw(c15336.31,10514.39) 15351.61,10494.16 ; 15340.56,10489.38 ccw(c15336.31,10514.39) 15351.61,10494.16 ; 15340.56,10489.38 ccw(c15336.31,10514.39) 15351.61,10494.16 ; 15340.56,10489.38 ccw(c15336.31,10514.39) 15351.61,10494.16 ; 15340.56,10489.38 ccw(c15336.31,10514.39) 15351.61,10494.16 ; 15340.56,10489.38 ccw(c15336.31,10514.39) 15351.61,10494.16 ; 15340.56,10489.38 ccw(c15336.31,10514.39) 15351.61,10494.16 ; 15340.56,10489.38 ccw(c15336.31,10514.39) 15351.61,10494.16 ; 15340.56,10489.38 ccw(c15336.31,10514.39) 15351.61,10494.16 ; 15340.56,10489.38 ccw(c15336.31,10514.39) 15351.61,10494.16 ; 15340.56,10489.38 ccw(c15336.31,10514.39) 15351.61,10494.16 ; 15340.56,10489.38 ccw(c15336.31,10514.39) 15351.61,10494.16 ; 15351.62,10494.16 15515.24,10617.94 ; 15515.24,10617.94 ccw(c15499.93,10638.17) 15525.3,10638.17 ; 15515.24,10617.94 ccw(c15499.93,10638.17) 15525.3,10638.17 ; 15515.24,10617.94 ccw(c15499.93,10638.17) 15525.3,10638.17 ; 15515.24,10617.94 ccw(c15499.93,10638.17) 15525.3,10638.17 ; 15515.24,10617.94 ccw(c15499.93,10638.17) 15525.3,10638.17 ; 15518.63,10812.8 cw(c15499.93,10795.65) 15525.3,10795.65 ; 15518.63,10812.8 cw(c15499.93,10795.65) 15525.3,10795.65 ; 15518.63,10812.8 cw(c15499.93,10795.65) 15525.3,10795.65 ; 15518.63,10812.8 cw(c15499.93,10795.65) 15525.3,10795.65 ; 15518.63,10812.8 cw(c15499.93,10795.65) 15525.3,10795.65 ; 15518.63,10812.8 cw(c15499.93,10795.65) 15525.3,10795.65 ; 15518.63,10812.8 cw(c15499.93,10795.65) 15525.3,10795.65 ; 15518.63,10812.8 cw(c15499.93,10795.65) 15525.3,10795.65 ; 15518.63,10812.8 cw(c15499.93,10795.65) 15525.3,10795.65 ; 15518.63,10812.8 cw(c15499.93,10795.65) 15525.3,10795.65 ; 15518.63,10812.8 cw(c15499.93,10795.65) 15525.3,10795.65 ; 15518.63,10812.8 cw(c15499.93,10795.65) 15525.3,10795.65 ; 15518.63,10812.8 cw(c15499.93,10795.65) 15525.3,10795.65 ; 15518.63,10812.8 cw(c15499.93,10795.65) 15525.3,10795.65 ; 15518.63,10812.8 cw(c15499.93,10795.65) 15525.3,10795.65 ; 15518.63,10812.8 cw(c15499.93,10795.65) 15525.3,10795.65 ; 15525.3,10638.17 15525.3,10795.65
BA11_7: IC2.90 U3.21 U4.21 | length 2339
  Top Layer 1 w5: v1@14899.38,10170.19 U3.21@14899.38,10232.03 ; v1@15500.16,10874.63 IC2.90@15552.45,10874.63
  Layer 3 w5: v1(14899.13,9709.47) 14899.13,9803 14915.25,9819.12 14915.25,10147.71 14914.08,10148.98 14899.22,10169.82 cw(c14903.29,10172.73) v1(14899.13,10169.94) ; v1@14899.13,10175.64 14899.13,10175.51 cw(c14903.29,10172.73) 14899.71,10176.22 14913.8,10190.35 ; 14915.25,10193.83 v1@14915.25,10315.63 ; 14913.8,10190.35 ccw(c14910.25,10193.88) 14915.25,10193.79 ; 14913.8,10190.35 ccw(c14910.25,10193.88) 14915.25,10193.79 ; 14913.8,10190.35 ccw(c14910.25,10193.88) 14915.25,10193.79 ; 14913.8,10190.35 ccw(c14910.25,10193.88) 14915.25,10193.79 ; 14913.8,10190.35 ccw(c14910.25,10193.88) 14915.25,10193.79 ; 14913.8,10190.35 ccw(c14910.25,10193.88) 14915.25,10193.79 ; 14913.8,10190.35 ccw(c14910.25,10193.88) 14915.25,10193.79 ; 14913.8,10190.35 ccw(c14910.25,10193.88) 14915.25,10193.79 ; 14913.8,10190.35 ccw(c14910.25,10193.88) 14915.25,10193.79 ; 14913.8,10190.35 ccw(c14910.25,10193.88) 14915.25,10193.79 ; 14913.8,10190.35 ccw(c14910.25,10193.88) 14915.25,10193.79 ; 14913.8,10190.35 ccw(c14910.25,10193.88) 14915.25,10193.79 ; 14913.8,10190.35 ccw(c14910.25,10193.88) 14915.25,10193.79 ; 14913.8,10190.35 ccw(c14910.25,10193.88) 14915.25,10193.79 ; 14913.8,10190.35 ccw(c14910.25,10193.88) 14915.25,10193.79 ; 14913.8,10190.35 ccw(c14910.25,10193.88) 14915.25,10193.79
  Bottom 6+gnd w5: v1(14899.13,9709.47) 14899.13,9771.15 U4.21@14899.38,9771.4 ; v1@14914.72,10316.17 v1(14914.97,10315.92) 14992.42,10429.36 ; v1@15499.68,10874.64 v1(15499.93,10874.39) 15477.11,10870.13 ccw(c15479.93,10855.02) 15469.64,10843.6 15510.21,10807.08 cw(c15499.93,10795.65) 15515.3,10795.65 15515.3,10638.17 ; 14992.42,10429.36 cw(c15021.64,10409.41) 15015.71,10444.28 ; 14992.42,10429.36 cw(c15021.64,10409.41) 15015.71,10444.28 ; 14992.42,10429.36 cw(c15021.64,10409.41) 15015.71,10444.28 ; 14992.42,10429.36 cw(c15021.64,10409.41) 15015.71,10444.28 ; 14992.42,10429.36 cw(c15021.64,10409.41) 15015.71,10444.28 ; 14992.42,10429.36 cw(c15021.64,10409.41) 15015.71,10444.28 ; 14992.42,10429.36 cw(c15021.64,10409.41) 15015.71,10444.28 ; 14992.42,10429.36 cw(c15021.64,10409.41) 15015.71,10444.28 ; 14992.42,10429.36 cw(c15021.64,10409.41) 15015.71,10444.28 ; 14992.42,10429.36 cw(c15021.64,10409.41) 15015.71,10444.28 ; 14992.42,10429.36 cw(c15021.64,10409.41) 15015.71,10444.28 ; 14992.42,10429.36 cw(c15021.64,10409.41) 15015.71,10444.28 ; 14992.42,10429.36 cw(c15021.64,10409.41) 15015.71,10444.28 ; 14992.42,10429.36 cw(c15021.64,10409.41) 15015.71,10444.28 ; 14992.42,10429.36 cw(c15021.64,10409.41) 15015.71,10444.28 ; 14992.42,10429.36 cw(c15021.64,10409.41) 15015.71,10444.28 ; 15015.71,10444.28 15338.88,10499.24 ccw(c15336.31,10514.39) 15345.58,10502.13 15509.2,10625.91 ; 15509.21,10625.92 ccw(c15499.93,10638.17) 15515.3,10638.17 ; 15509.21,10625.92 ccw(c15499.93,10638.17) 15515.3,10638.17 ; 15509.21,10625.92 ccw(c15499.93,10638.17) 15515.3,10638.17 ; 15509.21,10625.92 ccw(c15499.93,10638.17) 15515.3,10638.17 ; 15509.2,10625.91 ccw(c15499.93,10638.17) 15515.3,10638.17
BTN_1: IC11_IC101.12 IC15.14 | length 1885.5
  Top Layer 1 w8: IC11_IC101.12@19095.85,11424.24 19137.94,11424.24 19142.63,11419.55 19142.63,11314.98 19077.7,11250.05 19077.7,11145.55 19096.3,11126.95 19269.32,10953.93 19294.96,10953.93 19824.02,10953.93 20083.43,11213.33 20378.2,11213.33 20400,11191.54 IC15.14@20400,11173.82
BTN_2: IC11_IC102.12 IC15.3 | length 849.2
  Top Layer 1 w8: IC15.3@20400,10959.25 20400,10976.97 20496.85,11073.82 20613.17,11073.82 20680,11140.65 20680,11238.82 20660,11258.82 20565,11258.82 20490,11333.82 20490,11428.82 20475,11443.82 IC11_IC102.12@20435,11443.82
BTN_3: IC11_IC103.12 IC16.3 | length 1872.2
  Top Layer 1 w8: IC11_IC103.12@19110.43,9843.82 v1(19170,9843.82) ; v1(19170,10108.82) 19195,10133.82 19195,10298.32 19425.56,10528.88 20373.78,10528.88 20398.61,10553.71 20398.61,10590.15 IC16.3@20400,10591.53
  Layer 3 w8: v1(19170,9843.82) v1(19170,10108.82)
BTN_4: IC11_IC104.12 IC16.14 | length 1398
  Top Layer 1 w8: IC16.14@20400,10806.1 20400,10788.39 20479.57,10708.82 20623.54,10708.82 20725,10607.36 20725,10188.82 20665,10128.82 20567.57,10128.82 20543.79,10105.03 20526.21,10105.03 v1(20490,10068.82) ; IC11_IC104.12@20435,9843.82 v1(20485,9843.82)
  Layer 3 w8: v1(20485,9843.82) 20485,10061.72 20490,10066.72 v1(20490,10068.82)
BTN_5: IC11_IC105.12 IC17.14 | length 9803.1
  Top Layer 1 w8: IC11_IC105.12@13425.86,9908.82 v1(13478.15,9908.82) ; v1(13429.65,9693.82) 13429.65,8598.49 13604.32,8423.82 18660.15,8423.82 ; 18857,8423.82 19037,8603.82 19037,9200.42 19210.4,9373.82 19818.23,9373.82 20062,9617.59 20062,10240.82 20183,10361.82 20388,10361.82 20400,10373.82 IC17.14@20400,10426.1
  Layer 2 w8: v1(13429.65,9693.82) 13429.65,9695.31 13478.15,9743.82 v1(13478.15,9908.82)
BTN_DN: IC16.6 R80.1 SW7.S1 | length 3013.2
  Top Layer 1 w8: v1(18977.44,10120.5) 19425.76,10568.82 20145,10568.82 20240,10663.82 20320,10663.82 20320.84,10662.98 20515.84,10662.98 20549.46,10629.36 20549.46,10592.08 IC16.6@20550,10591.53 v1(20550,10528.82) ; v1(20785,10578.82) R80.1@20835,10578.82
  Unused w8: SW7.S1@18444.49,10328.22 18444.49,10030.98 SW7.S1@18494.09,9981.37 SW7.S1@18576.77,9981.37
  Layer 3 w8: SW7.S1@18576.77,9981.37 18641.46,9981.37 ; 18838.31,9981.37 v1(18977.44,10120.5) ; v1(20550,10528.82) 20630,10448.82 20685,10448.82 20785,10548.82 v1(20785,10578.82)
BTN_FUNC: IC17.6 R82.1 SW8.S1 | length 8525.8
  Top Layer 1 w8: 14163.78,8815 14163.78,8490 ; R82.1@14238.15,8490 14163.78,8490 ; 18649.97,8436.82 14206.33,8436.82 14163.78,8479.37 14163.78,8490 ; 18846.82,8436.82 19024,8614 19024,9209 19205,9390 19815,9390 19990,9565 v1(19990,9595) ; v1@20219.41,9594.41 20194.19,9619.63 20194.19,10104.63 20223.38,10133.82 20510,10133.82 20541.2,10165.02 20541.2,10202.74 IC17.6@20550,10211.53
  Unused w8: 13816.93,8682.72 13816.93,8765.39 13866.53,8815 14163.78,8815
  Layer 3 w8: v1(19990,9595) v1(20220,9595)
BTN_N: IC15.6 R78.1 SW5.S1 | length 5994.2
  Top Layer 1 w8: SW5.S1@16684.36,8680.84 16811.38,8553.82 R78.1@16867.56,8553.82 16867.56,8584.41 16878.15,8595 17036.97,8595 17150.15,8481.82 18241.15,8481.82 ; 18438,8481.82 18920.7,8964.52 18920.7,10134.12 19403.4,10616.82 20012.01,10616.82 20273.92,10878.73 20519.91,10878.73 20550,10908.82 IC15.6@20550,10959.25
  Unused w8: SW5.S1@16684.36,8680.84 SW5.S1@16684.36,8763.52 16733.97,8813.12 SW5.S1@17031.21,8813.12
BTN_PLAY: IC17.4 R84.1 SW2.S2 | length 2524.6
  Top Layer 1 w8: R84.1@20001.18,8778.82 20001.18,8780.12 20013.91,8792.85 20023.55,8792.85 20031.23,8800.53 20031.23,8869.87 ; 20030.85,8939.59 20030.85,9288.45 20147,9404.61 20147,10202.43 20248.38,10303.82 20440,10303.82 20450,10293.82 IC17.4@20450,10211.53 ; 20031.23,8939.2 20031.23,8869.87 ; SW2.S2@20367.72,8680.84 20367.72,8682.94 20207.39,8843.28 20057.82,8843.28 20031.23,8869.87
  Bottom 6+gnd w10: SW2.S2@20267.72,8713.12 SW2.S2@20367.72,8680.84 SW2.S2@20367.72,8763.52
BTN_REC: IC17.5 R83.1 SW1.S2 | length 2694.4
  Top Layer 1 w8: SW1.S2@19542.61,8680.84 19694.02,8680.84 20000,8986.82 ; R83.1@20001.18,8833.82 20000,8835 20000,8986.82 ; 20017,9003.82 20000,8986.82 ; 20017.85,9003.82 20017.85,9296.67 20132,9410.82 20132,10205.82 20245,10318.82 20455,10318.82 20500,10273.82 IC17.5@20500,10211.53
  Bottom 6+gnd w10: SW1.S2@19442.61,8713.12 SW1.S2@19542.61,8680.84 SW1.S2@19542.61,8763.52
BTN_STOP: IC17.3 R85.1 SW3.S2 | length 3647.3
  Top Layer 1 w8: R85.1@20001.18,8723.82 20040,8723.82 20150,8613.82 20385.37,8613.82 20452.39,8680.84 ; IC17.3@20400,10211.53 20400,10265.82 20375,10290.82 20253.77,10290.82 20160,10197.05 20160,9399.22 20045,9284.22 20045,8888.82 20077.54,8856.28 20276.62,8856.28 20452.06,8680.84 SW3.S2@21194.5,8680.84
  Bottom 6+gnd w10: SW3.S2@21094.5,8713.12 SW3.S2@21194.5,8680.84 SW3.S2@21194.5,8763.52
BTN_UP: IC16.11 R81.1 SW6.S1 | length 3328.2
  Top Layer 1 w8: v1(19260,10438.82) 19410,10588.82 20010,10588.82 20285,10863.82 20535,10863.82 20550,10848.82 IC16.11@20550,10806.1 20550,10758.82 20557,10751.82 20652.92,10751.82 20770.92,10633.82 R81.1@20825,10633.82
  Unused w8: SW6.S1@18444.49,11310.81 18444.49,11013.57 SW6.S1@18494.09,10963.96 SW6.S1@18576.77,10963.96
  Layer 3 w8: SW6.S1@18494.09,10963.96 18494.09,10880.94 18443.15,10830 18443.15,10743.82 18598.15,10588.82 ; 18795,10588.82 18911.14,10588.82 18913.01,10586.94 18926.99,10586.94 18928.86,10588.82 19110,10588.82 v1(19260,10438.82)
BTN_Y: IC15.11 R79.1 SW4.S1 | length 7476.5
  Top Layer 1 w8: SW4.S1@15437.68,8680.84 15437.68,8510.47 15493.15,8455 16786.5,8455 v1(16829.97,8498.48) 16830.32,8498.82 R79.1@16867.56,8498.82 ; v1@17155.35,8501.62 17157.36,8501.62 17164.16,8494.82 18235.76,8494.82 ; 18432.62,8494.82 18905,8967.2 18905,10138.82 19400,10633.82 20000,10633.82 20257.91,10891.73 20338.51,10891.73 20375,10928.22 20375,11008.82 20405,11038.82 20432.72,11038.82 20479.72,11085.82 20486.42,11085.82 20534.8,11134.19 20534.8,11140.9 20550,11156.1 IC15.11@20550,11173.82
  Unused w8: SW4.S1@15437.68,8680.84 SW4.S1@15437.68,8763.52 15487.29,8813.12 SW4.S1@15784.53,8813.12 ; v1(16829.97,8498.48) 16831.04,8499.54 17151.42,8499.54 17153.5,8501.62 v1(17155.6,8501.62)
CHARGE_STATUS: IC1.134 IC23.1 R126.1 R132.2 | length 6442.6
  Top Layer 1 w5: v1(16279.71,11221.38) 16290.51,11232.18 IC1.134@16290.51,11311.57 ; R132.2@19965.28,13140 19990.5,13140 20004.12,13126.37 v1(20004.12,13124.93)
  Top Layer 1 w10: v1(20170.63,12580) 20194.06,12603.43 20559.19,12603.43 20674.76,12719.01 20882.94,12719.01 20932.43,12768.49 20932.43,12814.72 20921.87,12825.28 20921.87,12871.51 20949.22,12898.86 20959.04,12898.86 20995.18,12935 IC23.1@21011.42,12935 21099.65,12935 R126.1@21104.65,12930
  Unused w5: v1(16279.71,11221.38) 16326.82,11174.27 16595.69,11174.27 16611.15,11158.82 16677.04,11158.82 16794.12,11041.74 16828.52,11041.74 16854.43,11015.83 16955.01,11015.83 17031.15,11091.96 17031.15,11193.54 17463,11625.39 ; 17659.85,11625.39 18914.86,11625.39 18983.28,11693.82 19438.28,11693.82 19512.91,11768.44 19896.73,11768.44 20090,11961.72 20090,12460.03 ; v1(20004.12,13124.93) 20004.12,12791.15 20118.36,12676.91
CHR1: IC1.129 R133.1 | length 6195.3
  Top Layer 1 w5: v1(16383.7,11194.81) 16381.64,11196.87 16381.64,11201.01 16381.02,11201.63 16381.02,11235.25 16394.61,11248.84 16394.61,11261.57 16388.94,11267.24 IC1.129@16388.94,11311.57 ; v1(20144.08,12580.88) 20160.34,12564.63 20177,12564.63 20196.53,12584.16 20237.55,12584.16
  Top Layer 1 w10: 20237.55,12584.16 20569.62,12584.16 20682.66,12697.2 20906.85,12697.2 v2(20929.65,12720) ; v2(21264.1,13145.76) 21264.1,13100.54 R133.1@21264.65,13100
  Unused w5: v1(16383.7,11194.81) 16383.7,11193.96 16393.38,11184.27 16599.83,11184.27 16615.29,11168.82 16681.18,11168.82 16798.26,11051.74 16832.66,11051.74 16858.57,11025.83 16950.87,11025.83 17021.15,11096.11 17021.15,11197.68 17458.85,11635.39 ; 17655.7,11635.39 18910.71,11635.39 18979.14,11703.82 19434.14,11703.82 19508.77,11778.44 19892.59,11778.44 20080,11965.86 20080,12464.17 ; v1(20144.08,12580.88) 20144.63,12580.33 20144.63,12568.17
  Bottom 6+gnd w10: v2(20929.65,12720) 21039.65,12830 21163.35,12830 21264.1,12930.75 v2(21264.1,13145.76)